# Altium PCB PCB.PcbDoc
Units mm, origin at the board's own origin, x right, y up, seen from the top; angles counter-clockwise.
Board outline 24.77 x 34.42 mm, 2 copper layers (Top Layer, Bottom Layer); 11 components, 19 nets, 58 pads, 6 vias.
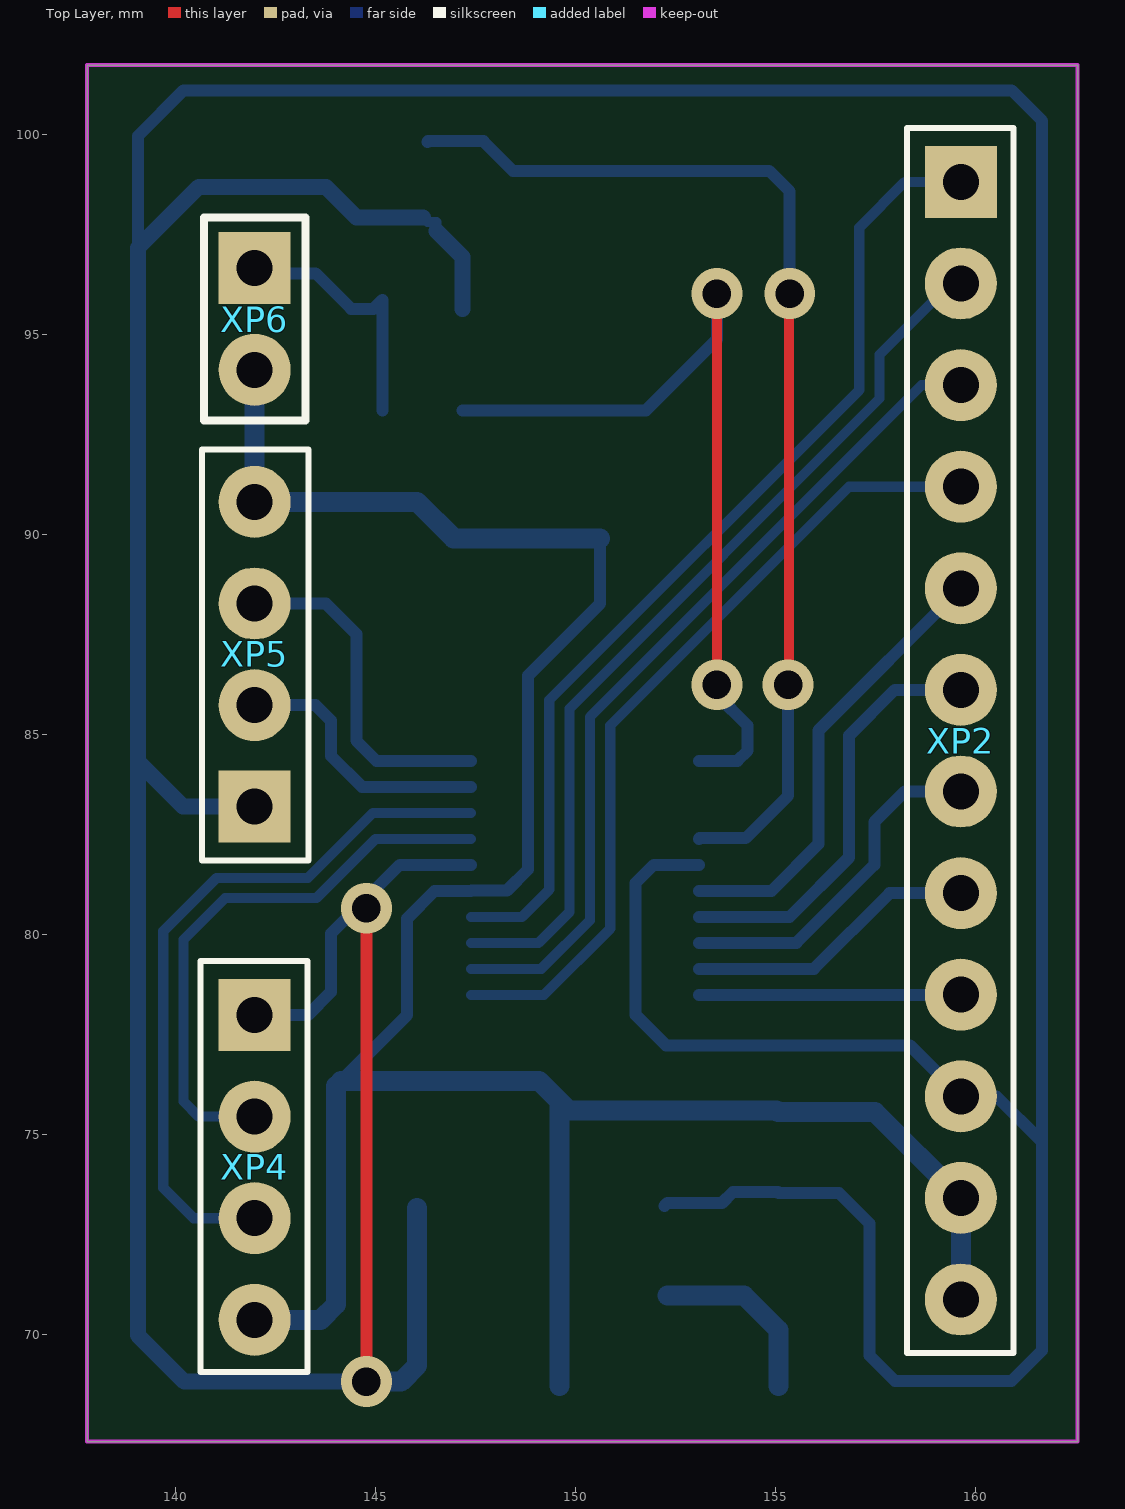
[diagram p0: Top Layer view]
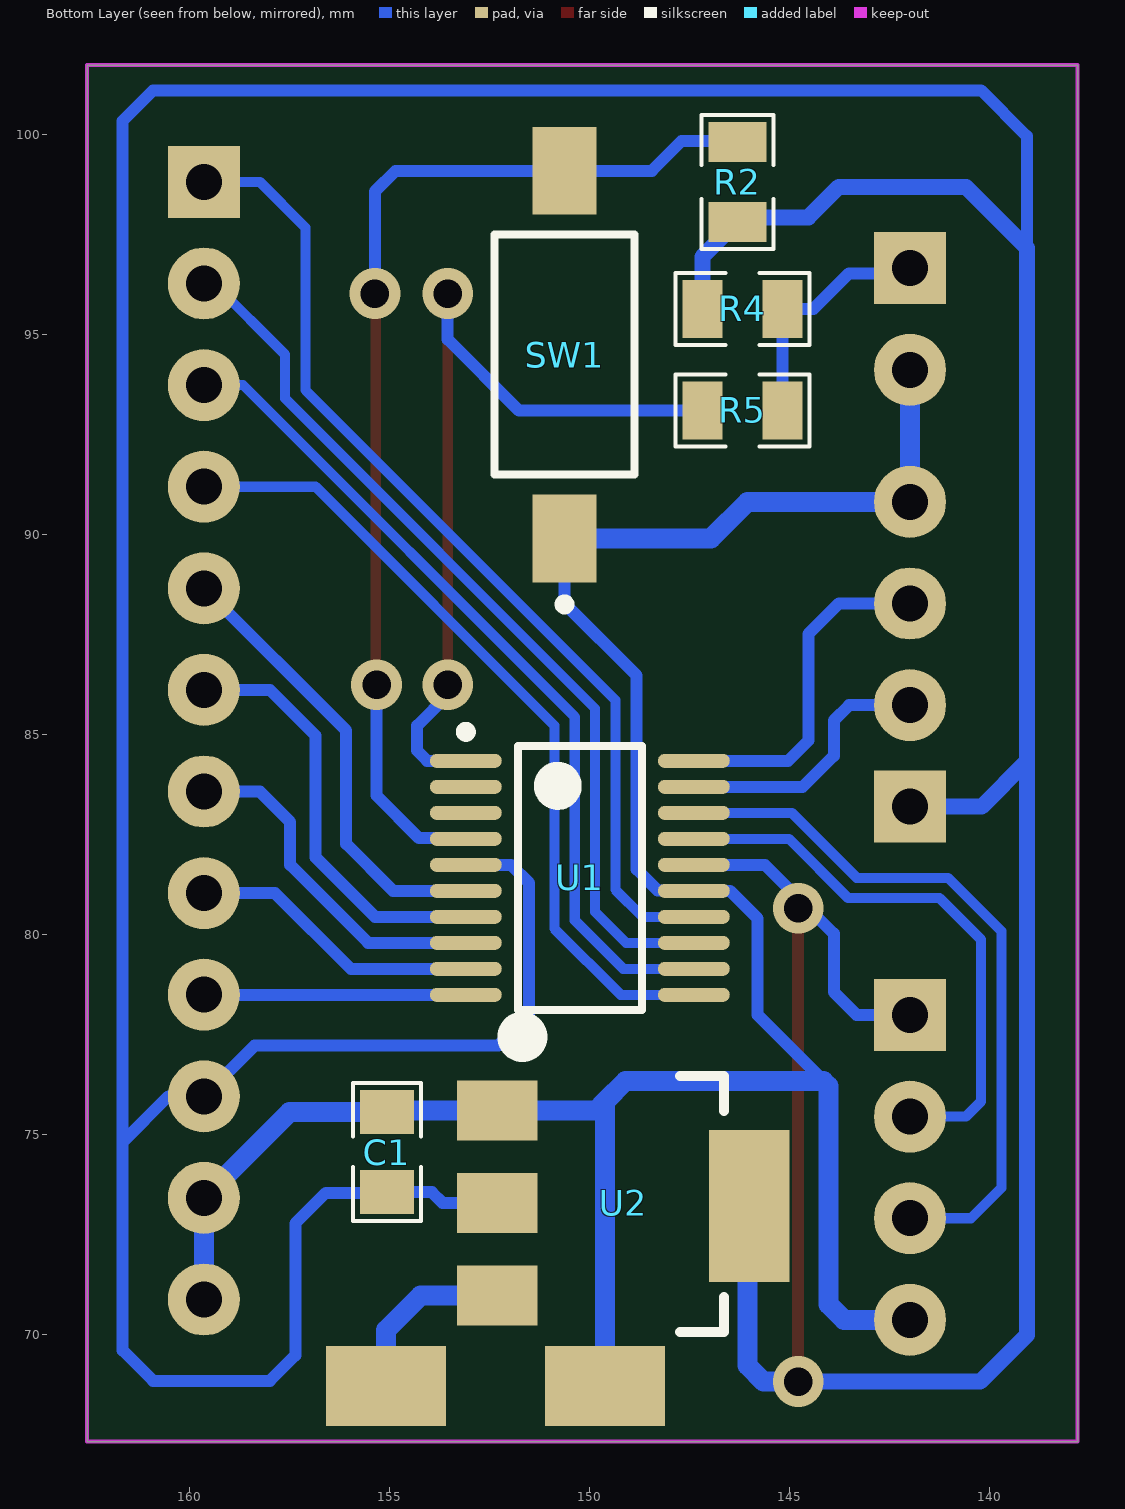
[diagram p1: Bottom Layer view, seen from below]
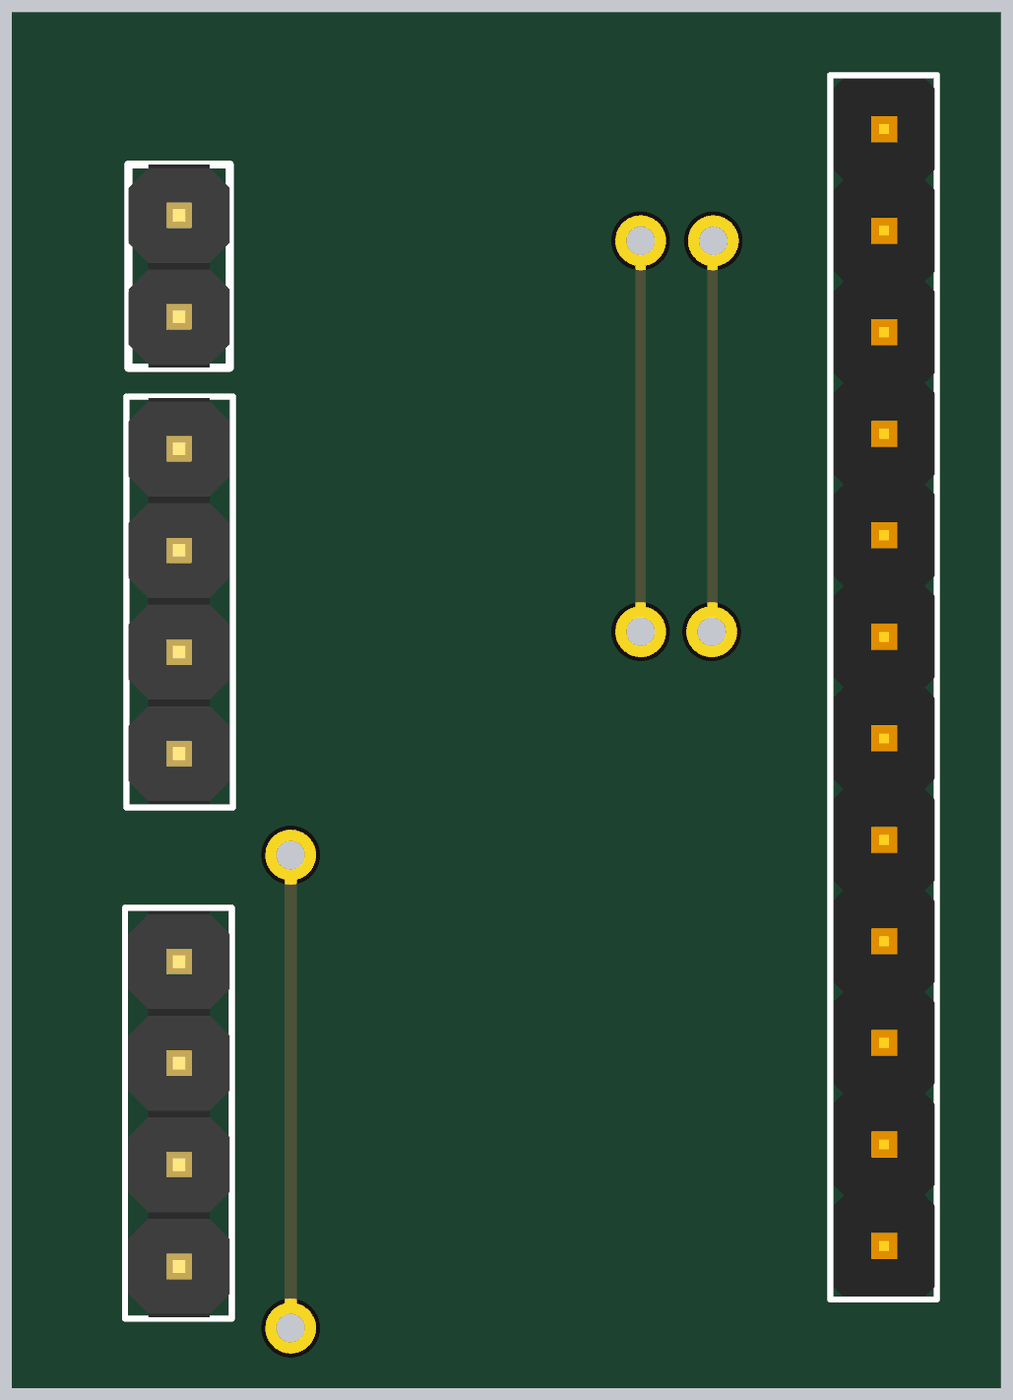
[diagram p2: 3D render of the assembled board from above, using the file's embedded part models]

## Layer stack, top to bottom
Top Solder: solder mask 0.0102, Solder Resist, Dk 3.5
Top Layer: signal copper 0.0356
Dielectric 1: dielectric 0.32, FR-4, Dk 4.8
Bottom Layer: signal copper 0.0356
Bottom Solder: solder mask 0.0102, Solder Resist, Dk 3.5

## Board outline
137.795,67.31 137.795,101.727 162.56,101.727 162.56,67.31

## Design rules (kind name [scope] priority, off if disabled: settings)
Clearance [All] p1: gap=0.254 ignorepadtopadclearanceinfootprint=FALSE except(0: Arc-Hole Track-Hole SMDPad-Hole THPad-Hole Via-Hole Fill-Hole Poly-Hole Region-Hole Text-Hole)
PolygonConnect [All] p1: connectstyle=Relief reliefconductorwidth=0.254 reliefentries=4 polygonreliefangle="90 Angle" airgapwidth=0.254
RoutingVias [All] p1: holewidth=0.711 width=1.27 viastyle="Through Hole" minholewidth=0.711 minwidth=1.27 maxholewidth=0.711 maxwidth=1.27
SolderMaskExpansion [All] p1: expansion=0.102
Width [All] p1: maxlimit=0.5 minlimit=0.254 preferedwidth=0.254 minimp=50.000000 maximp=50.000000 favimp=50.000000
30 further rules are at their usual default settings.

## Components (designator, comment, footprint, x,y, rotation, side; value= is the part's Value field where it differs from the comment)
C1 "CAP_SMD" CAP0805 155.067,74.549 r270 bottom
R2 "RES_SMD" RES0805 146.304,98.806 r270 bottom
R4 "RES_SMD" RES0805 146.177,95.631 r0 bottom
R5 "RES_SMD" RES0805 146.177,93.091 r180 bottom
SW1 "Button_2_SMD" SMD_BUT_6.3mm 150.622,94.488 r90 bottom
U1 "STM32F030F4P6" STM-TSSOP20_N 150.241,81.407 r180 bottom
U2 "AMS1117" SOT223-4 149.153,73.279 r270 bottom
XP2 "PLS-12" PLS-12 159.639,98.806 r270 top
XP4 "PLS-04" PLS-04 141.986,77.978 r270 top
XP5 "PLS-04" PLS-04 141.986,83.185 r90 top
XP6 "PLS-02" PLS-02 141.986,96.647 r270 top

## Footprints (in the part's own frame and the unit in brackets; to place one, negate y for a bottom-side part, rotate by r counter-clockwise, add the part's x,y. Pads: shape width x height; smd on the part's side, far side on the other; paste and mask are expansions set on the pad)
CAP0805 [mm] "Chip Capacitor, 2-Leads, Body 2,00x1,20mm, IPC Medium Density"
  rect 1.1x1.35 smd: 1(-1,0) 2(1,0)
  silkscreen extent -1.73,-0.85 1.73,0.85, body extent -1,-0.6 1,0.6, height 0.4
PLS-02 [mm]
  rect 1.8x1.8 hole 0.9: 1(0,0)
  round 1.8 hole 0.9: 2(2.54,0)
  silkscreen extent -1.27,-1.27 3.81,1.27, body extent -1.27,-1.27 3.81,1.27, height 8.6
PLS-04 [mm]
  rect 1.8x1.8 hole 0.9: 1(0,0)
  round 1.8 hole 0.9: 2(2.54,0) 3(5.08,0) 4(7.62,0)
  silkscreen extent -1.35,-1.35 8.93,1.32, body extent -1.27,-1.27 8.89,1.27, height 8.6
PLS-12 [mm]
  rect 1.8x1.8 hole 0.9: 1(0,0)
  round 1.8 hole 0.9: 2(2.54,0) 3(5.08,0) 4(7.62,0) 5(10.16,0) 6(12.7,0) 7(15.24,0) 8(17.78,0) 9(20.32,0) 10(22.86,0) 11(25.4,0) 12(27.94,0)
  silkscreen extent -1.35,-1.35 29.28,1.32, body extent -1.27,-1.27 29.21,11.48, height 8.89
RES0805 [mm] "Chip Resistor, 2-Leads, Body 2,00x1,20mm, IPC Medium Density"
  rect 1x1.45 smd: 1(-1,0) 2(1,0)
  silkscreen extent -1.68,-0.9 1.68,0.9, body extent -1,-0.6 1,0.6, height 0.4
SMD_BUT_6.3mm [mm] "SMD, 2-Leads, Body 6x3.5mm, Pitch 9.19mm"
  rect 2.2x1.6 smd: 1(-4.595,0)
  rect 2.18x1.6 smd: 2(4.595,0)
  silkscreen extent -6.37,-1.75 3,1.75, body extent -3.89,-1.79 3.89,1.79, height 2.54
SOT223-4 [mil]
  rect 59x79 smd: 1(-91,-124) 2(0,-124) 3(91,-124)
  rect 150x79 smd: 4(3,124)
  silkscreen extent -168,-104 127,99, body extent -127,-136 129,136, height 64
STM-TSSOP20_N [mm] "SOP, 20-Leads, Body 6.6x4.5mm, Pitch 0.65mm, IPC Medium Density"
  oval 1.8x0.35 smd: 1(-2.85,2.925) 2(-2.85,2.275) 3(-2.85,1.625) 4(-2.85,0.975) 5(-2.85,0.325) 6(-2.85,-0.325) 7(-2.85,-0.975) 8(-2.85,-1.625) 9(-2.85,-2.275) 10(-2.85,-2.925) 11(2.85,-2.925) 12(2.85,-2.275) 13(2.85,-1.625) 14(2.85,-0.975) 15(2.85,-0.325) 16(2.85,0.325) 17(2.85,0.975) 18(2.85,1.625) 19(2.85,2.275) 20(2.85,2.925)
  silkscreen extent -2.98,-3.3 1.55,3.77, body extent -3.2,-3.25 3.2,3.25, height 1.2

## Part data
C1: "Ceramic capacitor, 0805", Val=100nF
SW1: Case\/Package=SMD/SMT, Contact Current Rating=50mA, Contact Resistance=100mOhm, Manufacturer="TE Connectivity", Max Operating Temperature=85degC, Max Voltage Rating (DC)=12V, Min Operating Temperature=-35degC, Operating Force=180gf, Package Description="2-Pin Surface Mount Device, Body 6 x 3.5 mm, Pitch 9.19 mm", Package Quantity=1000, Package Reference=FSMSM, Voltage Rating (DC)=24V, Actuator Length=1.07mm, Actuator Material=Polyamide, Contact material=Brass, Contact Plating=Silver, Current rating=50mA, Datasheet URL=http://www.te.com/commerce/DocumentDelivery/DDEController?Action=showdoc&DocId=Customer+Drawing%7F1437566-3%7FC2%7Fpdf%7FEnglish%7FENG_CD_1437566-3_C2_1437566_3_1_c.dwg.pdf%7F1437566-3, Datasheet Version="Rev. C2, 08/2014", Electrical Life=20000Cycles, ELV=Compliant, Illumination Type=Illuminated, Lead Free=LeadFree, Manufacturer URL=http://www.te.com/, Mechanical Life=20000Cycles, Mount=SurfaceMount, Mounting Technology=SurfaceMount, Orientation=Straight, Packaging=LoosePiece, REACH SVHC=Unknown, RoHSCompliant=true, Switch Travel=0.25mm, Termination=GullWing, Throw Configuration=SPST
U1: "ARM Cortex-M0 32-bit MCU, 16 KB Flash, 4 KB Internal RAM, 15 I/Os, 20-Pin TSSOP, -40 to 85 degC, Tape and Reel", I/Os (High Current)=15, Operating Frequency(F) (Processor speed) (MHz)=48, Package Description="20-Pin Thin Shrink Small Outline Package, Body 6.5 x 4.4 mm, Pitch 0.65 mm", Package Reference=TSSOP20, Supply Voltage(Vcc) min (V)=2.4, ComponentLink1Description="Manufacturer URL", ComponentLink1URL=http://www.st.com/, ComponentLink2Description=Datasheet, ComponentLink2URL=http://www.st.com/st-web-ui/static/active/en/resource/technical/document/datasheet/DM00088500.pdf, Core="ARM Cortex-M0", DatasheetVersion="Rev. 2", FLASH Size (Prog) (kB)=16, Internal RAM Size (kB)=4, Mounting Technology="Surface Mount", Packing="Tape and Reel"
U2: "Voltage regulator"
R2: Val=1k
R4: Val=10k
R5: Val=560

## Free pads (board coordinates)
  rect 3x2 smd far side: 2(155.083,68.707) 3(149.606,68.707)

## Via types
v1: diameter 1.27, hole 0.711, Top Layer to Bottom Layer, 6 vias

## Nets (pads, with @x,y where several pads share a name; then routed paths per layer and width w, separated by ;. In a path a pad name is that pad's centre, name@x,y a point inside that pad or via, vN(x,y) a via of type N, cw(c..) or ccw(c..) an arc to the next point about the centre after c; other vN are vias at no path point)
+3.3: C1.2 R2.2 R4.2 U1.5 U1.16 U2.2 U2.4 XP2.10 XP4.1 XP5.1 | length 160.2
  Top Layer w0.3: v1(144.78,68.812) v1(144.78,80.645)
  Bottom Layer w0.254: U2.4 U2.4@146.05,73.156 ; R2.2@146.193,97.917 R2.2 146.529,97.806 R2.2@146.529,97.581
  Bottom Layer w0.3: 139.065,97.155 139.065,99.949 140.208,101.092 160.909,101.092 161.671,100.33 161.671,74.803 ; XP4.1 143.318,77.978 143.891,78.551 143.891,80.01 144.526,80.645 v1(144.78,80.645) 144.78,80.899 145.613,81.732 U1.16 ; U2.2@152.226,73.203 U2.2 153.67,73.279 153.94,73.549 C1.2 155.083,73.533 156.591,73.533 157.353,72.771 157.353,69.469 157.988,68.834 160.909,68.834 161.671,69.596 161.671,74.803 ; U1.5 151.963,81.732 151.511,81.28 151.511,77.978 152.273,77.216 158.369,77.216 XP2.10 160.528,75.946 161.671,74.803
  Bottom Layer w0.4: XP5.1 140.197,83.185 139.065,84.317 ; v1(144.78,68.812) 140.23,68.812 139.065,69.977 139.065,84.317 ; R2.2@146.193,97.917 144.526,97.917 143.764,98.679 140.589,98.679 139.065,97.155 139.065,84.317 ; R2.2@146.529,97.581 147.177,96.933 R4.2
  Bottom Layer w0.5: v1(144.78,68.812) 145.647,68.812 146.05,69.215 U2.4@146.05,73.156
+5: pad.2 U2.3 | length 4.5
  Bottom Layer w0.5: U2.3 154.219,70.968 155.083,70.104 pad.2
BOOT0: R5.1 U1.1 | length 21.3
  Top Layer w0.254: v1(153.543,86.233) v1(153.543,96.012)
  Bottom Layer w0.3: R5.1 151.765,93.091 153.543,94.869 v1(153.543,96.012) ; U1.1 154.055,84.332 154.309,84.586 154.309,85.213 153.543,85.979 v1(153.543,86.233)
GND: C1.1 pad.3 SW1.1 U1.15 U2.1 XP2.11 XP2.12 XP4.4 XP5.4 XP6.2 | length 63.8
  Bottom Layer w0.3: 144.018,76.2 144.145,76.327 145.796,77.978 145.796,80.391 146.487,81.082 U1.15 147.401,81.092 148.294,81.092 148.821,81.618 148.821,86.464 150.622,88.265 SW1.1 ; C1.1@155.026,75.59 C1.1 ; XP2.11@159.637,73.408 XP2.11
  Bottom Layer w0.5: XP4.4 143.637,70.358 144.018,70.739 144.018,76.2 ; XP6.2 XP5.4 146.05,90.805 146.962,89.893 SW1.1 ; 144.145,76.327 149.098,76.327 149.606,75.819 ; pad.3 149.606,75.819 ; C1.1@155.026,75.59 U2.1 149.835,75.59 149.606,75.819 ; C1.1 157.496,75.549 XP2.11@159.637,73.408 ; XP2.12 XP2.11
NetR4_1: R4.1 R5.2 XP6.1 | length 6.5
  Bottom Layer w0.3: XP6.1 142.113,96.52 143.51,96.52 144.399,95.631 144.952,95.631 145.177,95.856 R4.1 R5.2
NRST: R2.1 SW1.2 U1.4 | length 27.4
  Top Layer w0.254: v1(155.321,86.233) 155.342,86.254 155.342,95.991 v1(155.362,96.012)
  Bottom Layer w0.3: R2.1 146.32,99.822 147.701,99.822 148.44,99.083 SW1.2 154.846,99.083 155.362,98.567 v1(155.362,96.012) ; U1.4 153.109,82.4 154.261,82.4 155.321,83.46 v1(155.321,86.233)
PA0: U1.6 XP2.5 | length 11.3
  Bottom Layer w0.3: U1.6 154.91,81.082 156.083,82.255 156.083,85.09 XP2.5
PA1: U1.7 XP2.6 | length 10.7
  Bottom Layer w0.3: U1.7 155.362,80.432 156.845,81.915 156.845,84.963 157.988,86.106 XP2.6
PA2: U1.8 XP2.7 | length 8.7
  Bottom Layer w0.3: U1.8 155.53,79.782 157.48,81.732 157.48,82.804 158.242,83.566 XP2.7
PA3: U1.9 XP2.8 | length 7.3
  Bottom Layer w0.3: U1.9 155.967,79.132 157.861,81.026 XP2.8
PA4: U1.10 XP2.9 | length 6.5
  Bottom Layer w0.3: U1.10 153.093,78.484 159.637,78.484 XP2.9
PA5: U1.11 XP2.4 | length 20.5
  Bottom Layer w0.254: U1.11 149.221,78.482 150.876,80.137 150.876,85.217 156.845,91.186 XP2.4
PA6: U1.12 XP2.3 | length 21.3
  Bottom Layer w0.254: U1.12 149.153,79.132 150.368,80.347 150.368,85.431 158.663,93.726 XP2.3
PA7: U1.13 XP2.2 | length 22.7
  Bottom Layer w0.254: U1.13 149.084,79.782 149.86,80.558 149.86,85.642 157.607,93.389 157.607,94.488 159.385,96.266 XP2.2
PB1: U1.14 XP2.1 | length 25
  Bottom Layer w0.254: U1.14 148.672,80.432 149.352,81.112 149.352,85.852 157.099,93.599 157.099,97.663 158.242,98.806 XP2.1
Rx: U1.17 XP4.2 | length 14.2
  Bottom Layer w0.254: XP4.2 140.589,75.438 140.208,75.819 140.208,79.861 141.246,80.899 143.528,80.899 145.011,82.382 U1.17
SWCLK: U1.20 XP5.3 | length 8.6
  Bottom Layer w0.3: XP5.3 143.764,88.265 144.526,87.503 144.526,84.836 145.03,84.332 U1.20
SWDIO: U1.19 XP5.2 | length 6.8
  Bottom Layer w0.3: XP5.2 143.506,85.725 143.891,85.34 143.891,84.459 144.668,83.682 U1.19
Tx: U1.18 XP4.3 | length 17.9
  Bottom Layer w0.254: XP4.3 140.462,72.898 139.7,73.66 139.7,80.072 141.035,81.407 143.318,81.407 144.943,83.032 U1.18
pads on no net: U1.2 U1.3

## Keep-outs
Keep-Out Layer:
  the board outline again, w0.1